# Altium PCB 转接板 (6).PcbDoc
Units mil, origin at the board's own origin, x right, y up, seen from the top; angles counter-clockwise.
Board outline 2690 x 2420 mil, 2 copper layers (Top Layer, Bottom Layer); 12 components, 15 nets, 120 pads, 2 vias.
Unrouted connection lines stored in the file: 2.
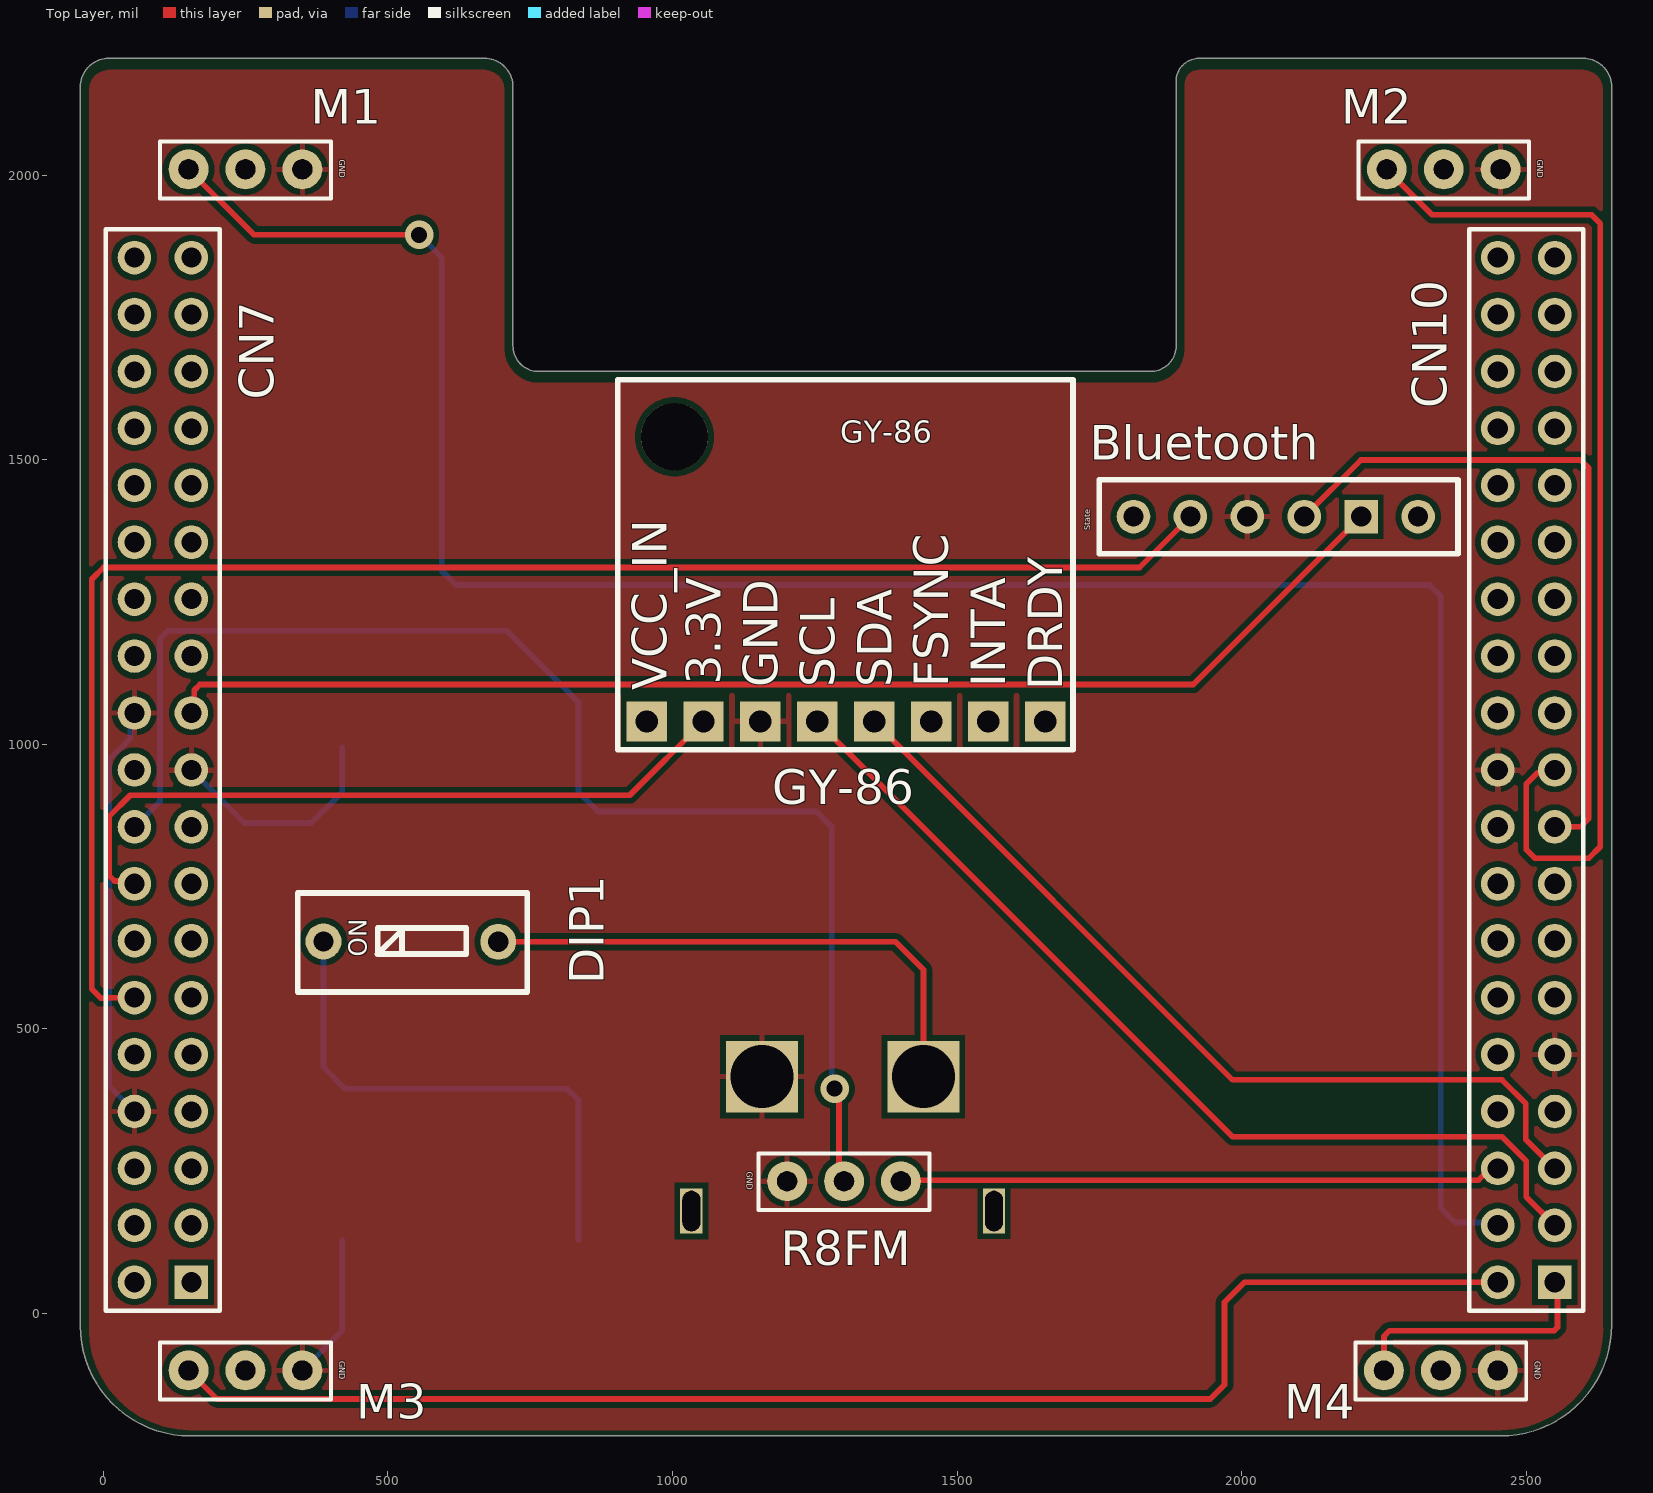
[diagram p0: Top Layer view]
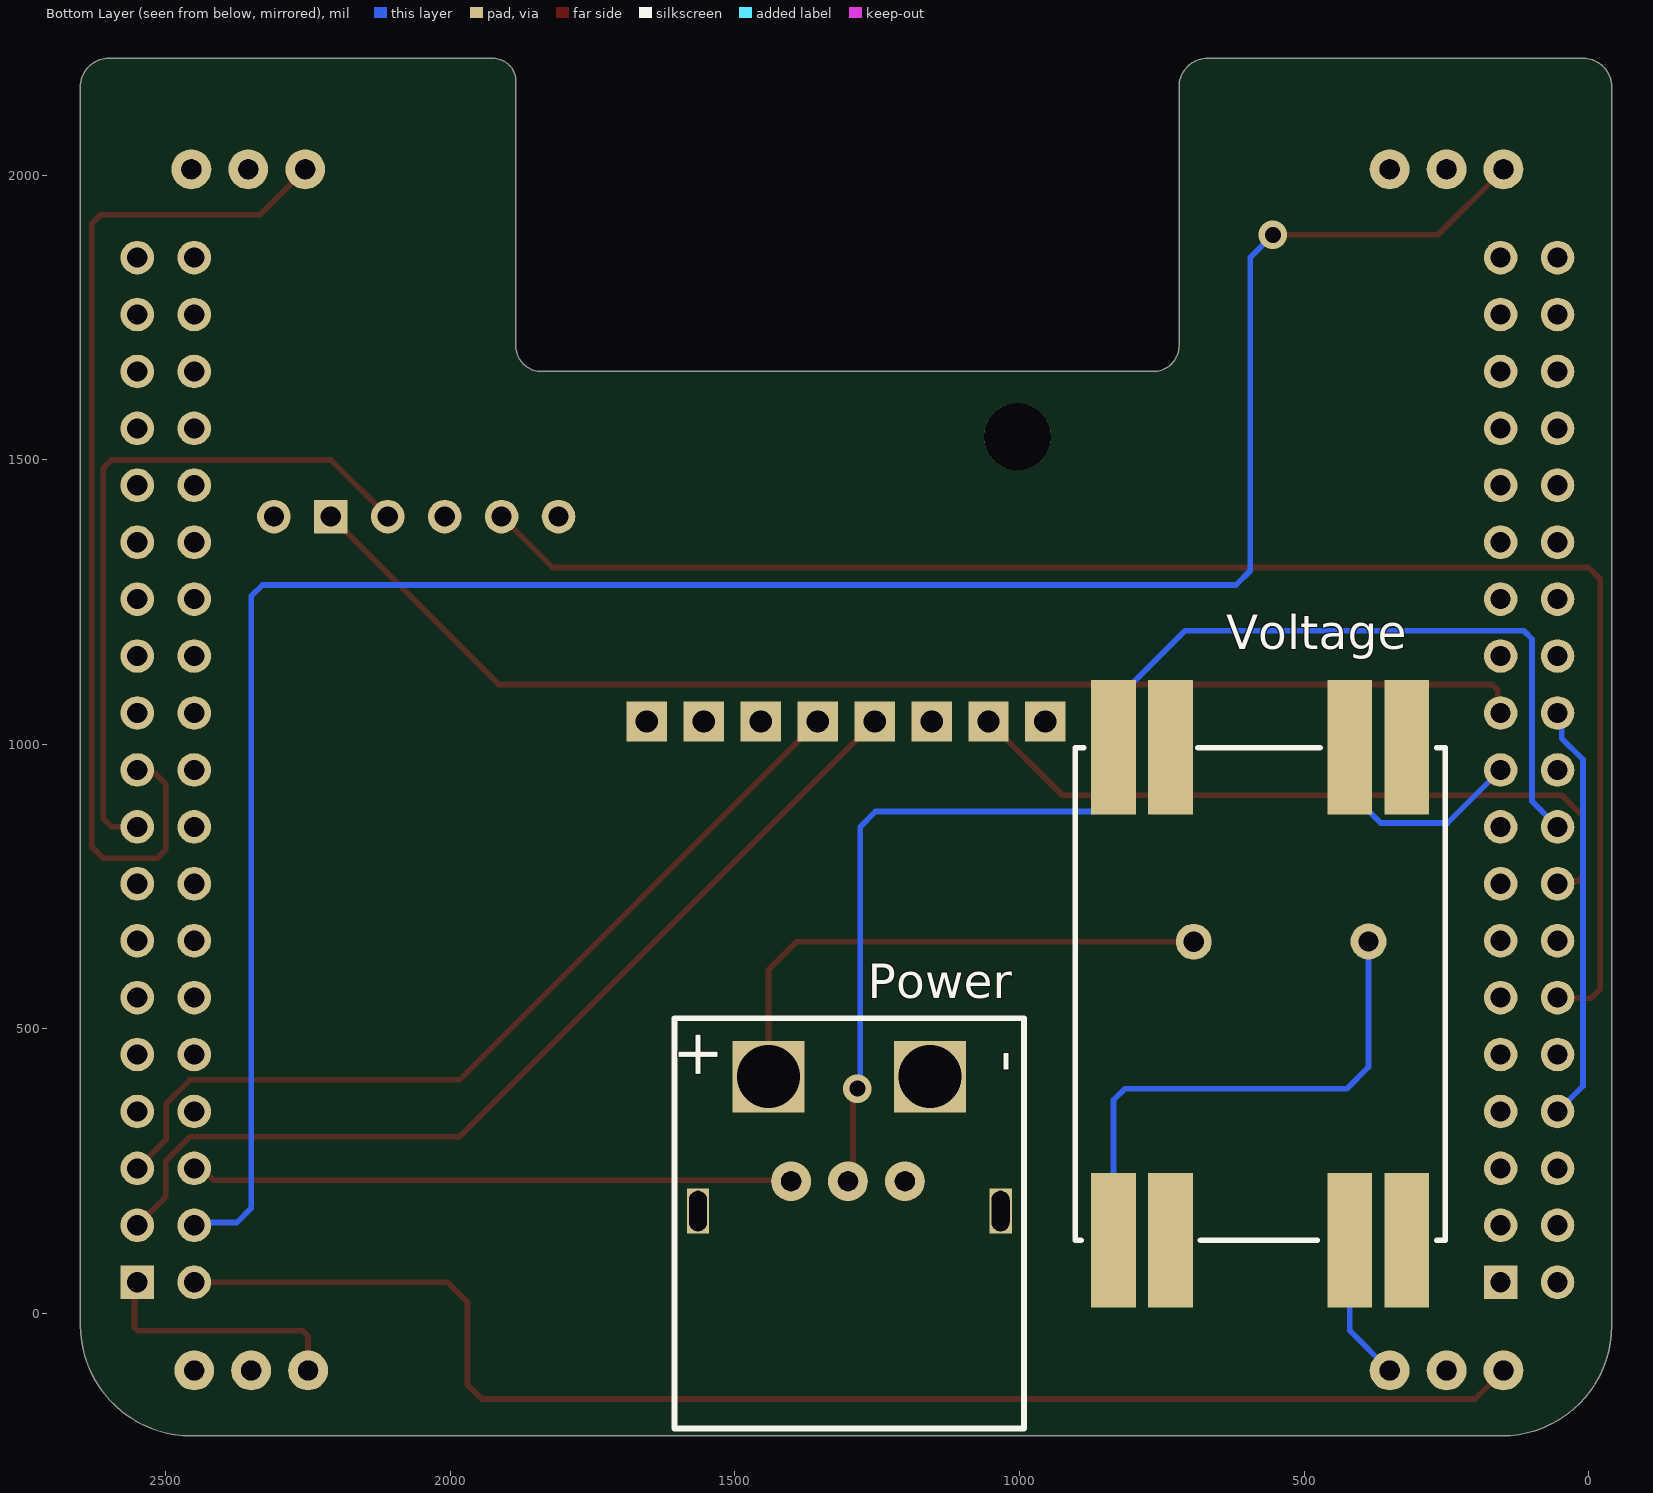
[diagram p1: Bottom Layer view, seen from below]

## Layer stack, top to bottom
Top Solder: solder mask 0.4, Solder Resist, Dk 3.5
Top Layer: signal copper 1.4
Dielectric 1: dielectric 12.6, FR-4, Dk 4.8
Bottom Layer: signal copper 1.4
Bottom Solder: solder mask 0.4, Solder Resist, Dk 3.5

## Board outline
-40,-21.57 ccw(c153.43,-21.57) 153.43,-215 2455,-215 ccw(c2455,-20) 2650,-20 2650,2155 ccw(c2600,2155) 2600,2205 1925,2205 ccw(c1925,2165) 1885,2165 1885,1700 cw(c1840,1700) 1840,1655 765,1655 cw(c765,1700) 720,1700 720,2155 ccw(c670,2155) 670,2205 10,2205 ccw(c10,2155) -40,2155

## Design rules (kind name [scope] priority, off if disabled: settings)
Clearance [All] p1: gap=10 ignorepadtopadclearanceinfootprint=FALSE except(0: Arc-Hole Track-Hole SMDPad-Hole THPad-Hole Via-Hole Fill-Hole Poly-Hole Region-Hole Text-Hole)
HoleSize [All] p1: absolutevalues=TRUE maxlimit=120 minlimit=1 maxpercent=80.000 minpercent=20.000
PolygonConnect [All] p1: connectstyle=Relief reliefconductorwidth=10 reliefentries=4 polygonreliefangle="90 Angle" airgapwidth=10
RoutingVias [All] p1: holewidth=28 width=50 viastyle="Through Hole" minholewidth=28 minwidth=50 maxholewidth=28 maxwidth=50
SilkToSilkClearance [All] p1: silktosilkclearance=0
SilkToSolderMaskClearance [IsPad] p1: minsilkscreentomaskgap=2 clearancetoexposedcopper=TRUE
SolderMaskExpansion [All] p1: expansion=4 istentingtop=FALSE
Width [All] p1: maxlimit=10 minlimit=10 preferedwidth=10
27 further rules are at their usual default settings.

## Components (designator, comment, footprint, x,y, rotation, side; value= is the part's Value field where it differs from the comment)
Bluetooth "Bluetooth" bluetooth 2065,1400 r0 top
CN7 "CN7" "Header 19X2" 98.94,946.06 r90 top
CN10 "CN10" "Header 19X2" 2493.94,946.06 r90 top
DIP1 "" SW 560,660 r90 top
GY-86 "GY-86" GY-86 1285,1370 r0 top
M1 "M" Motor 1888.5,2242.5 r180 top
M2 "M" Motor 3993.5,2242.5 r180 top
M3 "M" Motor 1888.5,132.5 r180 top
M4 "M" Motor 3988.5,132.5 r180 top
Power "Power" Power 1325.98,151.22 r0 bottom
R8FM "R8FM" R8FM 1330,240 r180 top
Voltage "*" DM02 502.32,505.75 r90 bottom

## Footprints (in the part's own frame and the unit in brackets; to place one, negate y for a bottom-side part, rotate by r counter-clockwise, add the part's x,y. Pads: shape width x height; smd on the part's side, far side on the other; paste and mask are expansions set on the pad)
bluetooth [mm]
  round 1.5 hole 0.9 paste+0 mask+0.102: 1(-6.477,0) 2(-3.937,0) 3(-1.397,0) 4(1.143,0) 6(6.223,0)
  rect 1.5x1.5 hole 0.9 paste+0 mask+0.102: 5(3.683,0)
  silkscreen extent -8,-1.65 8,1.65
DM02 [mm]
  rect 6x2 smd paste+0.102 mask+0.102: 1(-9.573,8.45) 2(-9.573,-2.09) 3(12.427,8.45) 4(12.427,-2.09) 5(-9.573,5.91) 6(-9.573,-4.63) 7(12.427,5.91) 8(12.427,-4.63)
  silkscreen extent -9.57,-6.35 12.4,10.16
GY-86 [mm]
  rect 1.8x1.8 hole 1 paste+0 mask+0.051: 1(-8.382,-8.382) 2(-5.852,-8.382) 3(-3.312,-8.382) 4(-0.772,-8.382) 5(1.768,-8.382) 6(4.308,-8.382) 7(6.848,-8.382) 8(9.398,-8.382)
  round 3 hole 3 unplated paste+0: ""(-7.145,4.325)
  silkscreen extent -9.68,-9.65 10.64,6.86
"Header 19X2" [mm]
  rect 1.5x1.5 hole 0.9 paste+0 mask+0.051: 1(-22.633,-1.424)
  round 1.5 hole 0.9 paste+0 mask+0.051: 2(-22.633,1.116) 3(-20.093,-1.424) 4(-20.093,1.116) 5(-17.553,-1.424) 6(-17.553,1.116) 7(-15.013,-1.424) 8(-15.013,1.116) 9(-12.473,-1.424) 10(-12.473,1.116) 11(-9.933,-1.424) 12(-9.933,1.116) 13(-7.393,-1.424) 14(-7.393,1.116) 15(-4.853,-1.424) 16(-4.853,1.116) 17(-2.313,-1.424) 18(-2.313,1.116) 19(0.227,-1.424) 20(0.227,1.116) 21(2.767,-1.424) 22(2.767,1.116) 23(5.307,-1.424) 24(5.307,1.116) 25(7.847,-1.424) 26(7.847,1.116) 27(10.387,-1.424) 28(10.387,1.116) 29(12.927,-1.424) 30(12.927,1.116) 31(15.467,-1.424) 32(15.467,1.116) 33(18.007,-1.424) 34(18.007,1.116) 35(20.547,-1.424) 36(20.547,1.116) 37(23.087,-1.424) 38(23.087,1.116)
  silkscreen extent -23.9,-2.69 24.36,2.39
Motor [mil]
  round 70 hole 35 slot 35.2 at 0 deg paste+0 mask+2: 1(1538.5,232.5) 2(1638.5,232.5) 3(1738.5,232.5)
  silkscreen extent 1488,184 1788,284
Power [mm]
  rect 3.2x3.2 hole 2.8 paste+0 mask+0.102: 1(-4.279,-6.731) 2(2.921,-6.731)
  rect 1x2 hole 0.8 slot 1.8 at 90 deg paste+0 mask+0.051: 3(-7.429,-0.731)
  rect 1x2 hole 0.8 slot 1.8 at 90 deg paste+0 mask+0.102: 4(6.071,-0.731)
  silkscreen extent -8.48,-9.33 7.12,8.97
R8FM [mil]
  round 70 hole 35 slot 35.2 at 0 deg paste+0 mask+2: 1(-71.5,7.5) 2(28.5,7.5) 3(128.5,7.5)
  silkscreen extent -122,-42 178,59
SW [mm]
  round 1.6 hole 0.9 paste+0 mask+0.051: 1(-0.173,-3.409) 2(-0.163,4.391)
  silkscreen extent -2.41,-4.7 2,5.54

## Part data
DIP1: library part "拨码开关 2.54*1"
Voltage: library part Component_1

## Via types
v1: diameter 50, hole 28, Top Layer to Bottom Layer, 2 vias

## Nets (pads, with @x,y where several pads share a name; then routed paths per layer and width w, separated by ;. In a path a pad name is that pad's centre, name@x,y a point inside that pad or via, vN(x,y) a via of type N, cw(c..) or ccw(c..) an arc to the next point about the centre after c; other vN are vias at no path point)
3V3_1: Bluetooth.2 CN7.12 | length 2777.5
  Top Layer w10: CN7.12 10.47,555 9.61,554.14 -4.14,554.14 -20,570 -20,1290 0.47,1310.47 1820.47,1310.47 Bluetooth.2
3V3_2: CN7.16 GY-86.2 | length 1267.6
  Top Layer w10: CN7.16 50,760 20,760 10.47,769.53 10.47,873.44 47.5,910.47 925.07,910.47 GY-86.2
5V_1: CN7.18 R8FM.2 Voltage.3 | length 2401
  Top Layer w10: v1(1285,395) 1292.65,387.35 1292.65,241.35 R8FM.2
  Bottom Layer w10: CN7.18 100,900 100,1185 114.53,1199.53 709.21,1199.53 835,1073.74 Voltage.3 835,916.26 869.37,881.89 1253.11,881.89 1280,855 1280,400 v1(1285,395)
11.1V_1: DIP1.1 Power.2 | length 954.9
  Top Layer w10: DIP1.1 1391.81,653.19 1440.98,604.02 Power.2
11.1V_2: DIP1.2 Voltage.1 | length 938.7
  Bottom Layer w10: DIP1.2 387.12,432.88 425,395 815,395 835,375 Voltage.1
GND: Bluetooth.3 CN7.8 CN7.19 CN7.22 CN10.9 CN10.20 GY-86.3 M1.1 M2.1 M3.1 M4.1 Power.1 R8FM.3 Voltage.2 Voltage.4 | length 1399.6
  Bottom Layer w10: CN7.8 10.47,399.53 10.47,973.44 47.5,1010.47 47.5,1047.5 CN7.22 ; CN7.19 248.11,861.89 365.67,861.89 420.04,916.26 Voltage.4 ; M3.1 420.04,-29.96 Voltage.2
PB6: Bluetooth.4 CN10.17 | length 1228.5
  Top Layer w10: Bluetooth.4 2209.52,1499.53 2595.47,1499.53 2610,1485 2610,870 2595,855 CN10.17
PB7: Bluetooth.5 CN7.21 | length 2218.4
  Top Layer w10: CN7.21 160,1060 160,1095 170,1105 1915,1105 Bluetooth.5
PB8: CN10.3 GY-86.4 | length 1698.9
  Top Layer w10: GY-86.4 1984.13,310.47 2457.5,310.47 2500,267.97 2500,205 CN10.3
PB9: CN10.5 GY-86.5 | length 1557.4
  Top Layer w10: GY-86.5 1984.13,410.47 2457.5,410.47 2499.06,368.91 2499.06,305.94 CN10.5
PC5: CN10.6 R8FM.1 | length 1057.8
  Top Layer w10: R8FM.1 1403.37,234.37 2416.1,234.37 2436.73,255 CN10.6
PC6: CN10.4 M1.3 | length 4020.3
  Top Layer w10: M1.3 265,1895 v1(555,1895)
  Bottom Layer w10: v1(555,1895) 595,1855 595,1305 620,1280 2330,1280 2350,1260 2350,185 2375,160 2445,160 CN10.4
PC7: CN10.19 M2.3 | length 1829.2
  Top Layer w10: M2.3 2335,1930 2615,1930 2630,1915 2630,820 2610,800 2515,800 2500,815 2500,930 2520,950 2545,950 CN10.19
PC8: CN10.2 M3.3 | length 2490.6
  Top Layer w10: M3.3 200,-150 1945,-150 1970,-125 1970,20 2005,55 CN10.2
PC9: CN10.1 M4.3 | length 452.8
  Top Layer w10: M4.3 2250,-40 2260,-30 2549.14,-30 2555,-24.14 2555,50 CN10.1
pads on no net: Bluetooth.1 Bluetooth.6 CN7.1 CN7.2 CN7.3 CN7.4 CN7.5 CN7.6 CN7.7 CN7.9 CN7.10 CN7.11 CN7.13 CN7.14 CN7.15 CN7.17 CN7.20 CN7.23 CN7.24 CN7.25 CN7.26 CN7.27 CN7.28 CN7.29 CN7.30 CN7.31 CN7.32 CN7.33 CN7.34 CN7.35 CN7.36 CN7.37 CN7.38 CN10.7 CN10.8 CN10.10 CN10.11 CN10.12 CN10.13 CN10.14 CN10.15 CN10.16 CN10.18 CN10.21 CN10.22 CN10.23 CN10.24 CN10.25 CN10.26 CN10.27 CN10.28 CN10.29 CN10.30 CN10.31 CN10.32 CN10.33 CN10.34 CN10.35 CN10.36 CN10.37 CN10.38 GY-86. GY-86.1 GY-86.6 GY-86.7 GY-86.8 M1.2 M2.2 M3.2 M4.2 Power.3 Power.4 Voltage.5 Voltage.6 Voltage.7 Voltage.8

## Polygon pours and split planes (outlines as drawn)
GND on Top Layer "GND_L01_P002" (solid, remove dead copper, pour order 2): -165,2490 2820,2490 3180,2130 2975,1925 2975,-710 -55,-710 -175,-590

## Silkscreen, mask and mechanical layers (free items; w line width, h text height)
Mechanical 1:
  lines w10: -40,-21.57 ccw(c153.43,-21.57) 153.43,-215 2455,-215 ccw(c2455,-20) 2650,-20 2650,1930 2650,2155 ccw(c2600,2155) 2600,2205 2310,2205 1940,2205 1925,2205 ccw(c1925,2165) 1885,2165 1885,1710 1885,1700 cw(c1840,1700) 1840,1655 1825,1655 765,1655 cw(c765,1700) 720,1700 720,2155 ccw(c670,2155) 670,2205 10,2205 ccw(c10,2155) -40,2155 -40,1925 -40,-21.57

## Text inside footprints (layer, text, board x,y; h text height)
Bluetooth: Top Overlay "State" at 1734,1376 h10 r90
DIP1: Top Overlay "ON" at 462.91,627.09 h31.5 r90
GY-86: Top Overlay "3.3V" at 1085,1105 h60 r90; Top Overlay "GND" at 1185,1100 h60 r90; Top Overlay "SCL" at 1285,1100 h60 r90; Top Overlay "SDA" at 1385,1100 h60 r90; Top Overlay "FSYNC" at 1485,1100 h60 r90; Top Overlay "INTA" at 1585,1100 h60 r90; Top Overlay "DRDY" at 1685,1095 h60 r90; Top Overlay "VCC_IN" at 990,1095 h60 r90
M1: Top Overlay "GND" at 414.5,2026.5 h10 r270
M2: Top Overlay "GND" at 2519.5,2026.5 h10 r270
M3: Top Overlay "GND" at 414.5,-83.5 h10 r270
M4: Top Overlay "GND" at 2514.5,-83.5 h10 r270
Power: Bottom Overlay "+" at 1530.65,409.22 h80 r270; Bottom Overlay "-" at 1053.5,462.56 h80 r90
R8FM: Top Overlay "GND" at 1131,249 h10 r270